# EAGLE board schematic (EAGLE 5.12)
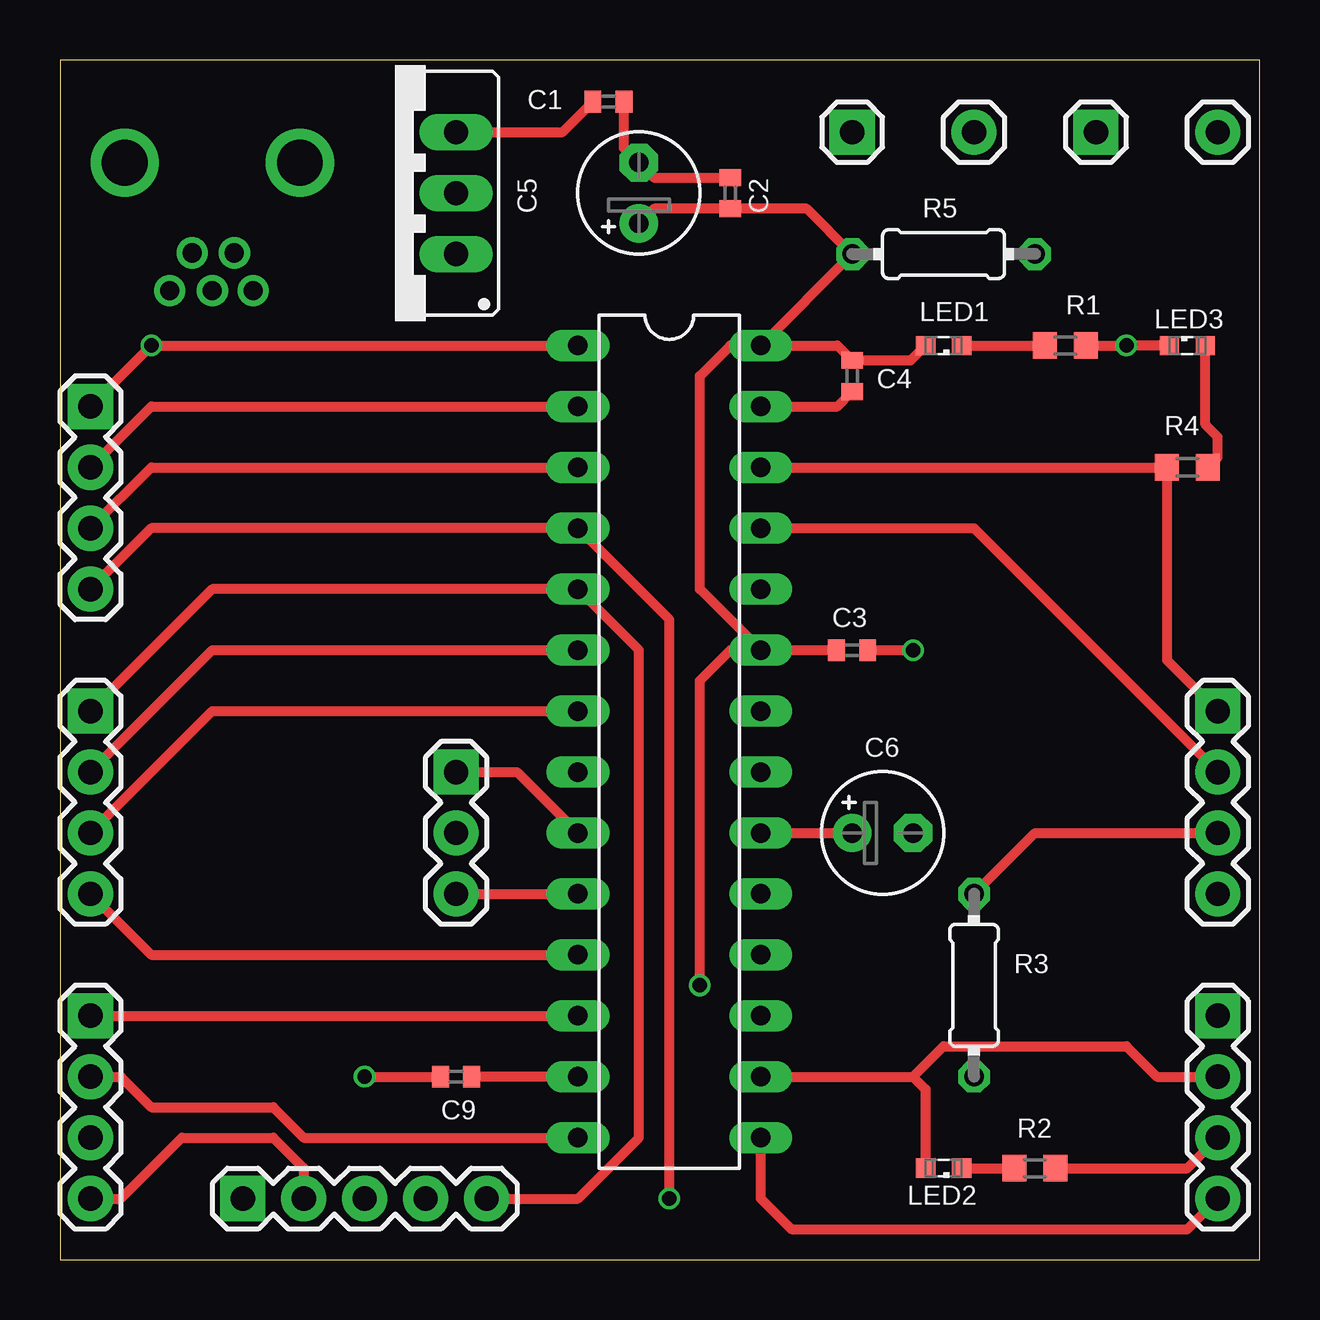
[diagram p0: board, top side]
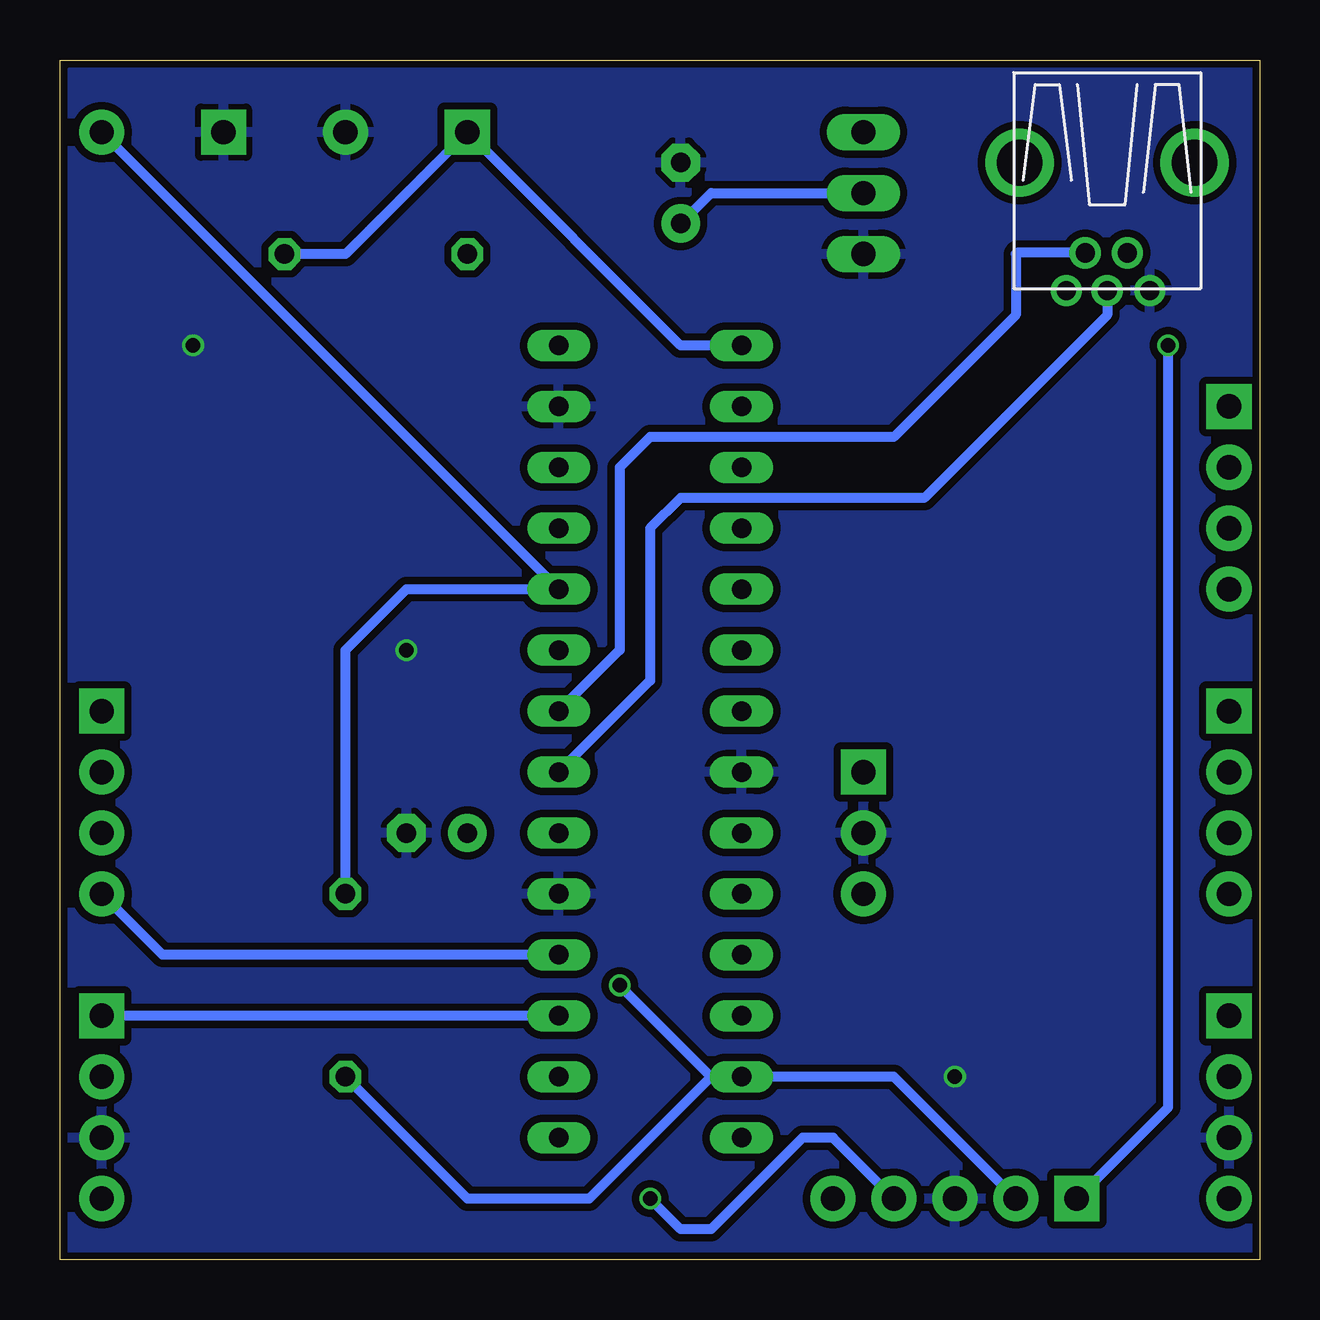
[diagram p1: board, bottom side, seen from below]

Size 50 x 50 mm. Coordinates in mm from the lower left corner, seen from the top.
Outline: 0,0 50,0 50,50 0,50 0,0
Copper layers (1*16): Top 0.035mm / dielectric 1.5mm / Bottom 0.035mm
Design rules "SeeedStudio_2layer_DRU_no_angle_20140221": minimum track width 6mil, minimum drill 12mil, track to track 6mil, track to pad 6mil, pad to pad 6mil, via to via 6mil, smd to smd 0mil, copper to edge 10mil, drill to drill 10mil, minimum pad ring 10mil, minimum via ring 6mil, stop-mask expansion 2mil, vias tented up to drill 100mil, thermal gap 10mil

## Footprints (pad centres in the part's own frame; a part is rotated, then mirrored left to right if it is on the bottom)
C0402 = smd 0.7 x 0.9: 1 -0.65,0; 2 0.65,0
E2,5-5 = drill 0.813 pad 1.6 round: + -1.27,0 | drill 0.813 pad 1.6 octagon: - 1.27,0
SML0603 = smd 0.8 x 0.8: A 0.75,0; C -0.75,0
R0603 = smd 1 x 1.1: 1 -0.85,0; 2 0.85,0
0204/7 = drill 0.813 octagon: 1 -3.81,0; 2 3.81,0
DIL28-3 = drill 0.813 long: 1 -16.51,-3.81; 2 -13.97,-3.81; 3 -11.43,-3.81; 4 -8.89,-3.81; 5 -6.35,-3.81; 6 -3.81,-3.81; 7 -1.27,-3.81; 8 1.27,-3.81; 9 3.81,-3.81; 10 6.35,-3.81; 11 8.89,-3.81; 12 11.43,-3.81; 13 13.97,-3.81; 14 16.51,-3.81; 15 16.51,3.81; 16 13.97,3.81; 17 11.43,3.81; 18 8.89,3.81; 19 6.35,3.81; 20 3.81,3.81; 21 1.27,3.81; 22 -1.27,3.81; 23 -3.81,3.81; 24 -6.35,3.81; 25 -8.89,3.81; 26 -11.43,3.81; 27 -13.97,3.81; 28 -16.51,3.81
USB-MINIB = drill 0.8 round: D+ 4.064,0; D- 2.489,0.914; GND 4.064,-1.778; ID 2.489,-0.838; VBUS 4.064,1.702 | drill 1.9 round: P$6 -1.27,-3.65; P$7 -1.27,3.65
TO220 = drill 1.016 long: 1 -2.54,0; 2 0,0; 3 2.54,0
1X03 = drill 1.016 pad 1.88 square: 1 0,0 | drill 1.016 pad 1.88 round: 2 2.54,0; 3 5.08,0
1X04 = drill 1.016 pad 1.88 square: 1 0,0 | drill 1.016 pad 1.88 round: 2 2.54,0; 3 5.08,0; 4 7.62,0
1X05 = drill 1.016 pad 1.88 square: 1 0,0 | drill 1.016 pad 1.88 round: 2 2.54,0; 3 5.08,0; 4 7.62,0; 5 10.16,0
BUTTON = drill 1.016 pad 1.88 square: 1 -2.54,0 | drill 1.016 pad 1.88 round: 2 2.54,0

## Placement (x,y rotation side)
C1  0.1uF  [C0402]  22.86,48.26 0 top
C2  0.1uF  [C0402]  27.94,44.45 90 top
C3  0.1uF  [C0402]  33.02,25.4 0 top
C4  0.1uF  [C0402]  33.02,36.83 270 top
C5  10uF  [E2,5-5]  24.13,44.45 90 top
C6  10uF  [E2,5-5]  34.29,17.78 0 top
C9  0.1uF  [C0402]  16.51,7.62 180 top
LED1  Red  [SML0603]  36.83,38.1 180 top
LED2  Red  [SML0603]  36.83,3.81 180 top
LED3  Green  [SML0603]  46.99,38.1 0 top
R1  330  [R0603]  41.91,38.1 180 top
R2  330  [R0603]  40.64,3.81 0 top
R3  10k  [0204/7]  38.1,11.43 270 top
R4  330  [R0603]  46.99,33.02 0 top
R5  10k  [0204/7]  36.83,41.91 180 top
U$1  PIC32MX250F128B  [DIL28-3]  25.4,21.59 270 top
U$2  USB  [USB-MINIB]  6.35,44.45 270 top
U$3  LD1117  [TO220]  16.51,44.45 90 top
U$5  8MHz  [1X03]  16.51,20.32 270 top
U$6  1X04_HEADER  [1X04]  1.27,35.56 270 top
U$7  1X04_HEADER  [1X04]  1.27,22.86 270 top
U$8  1X04_HEADER  [1X04]  1.27,10.16 270 top
U$9  PICKIT3  [1X05]  7.62,2.54 0 top
U$10  RESET  [BUTTON]  35.56,46.99 0 top
U$11  USER  [BUTTON]  45.72,46.99 0 top
U$12  1X04_HEADER  [1X04]  48.26,22.86 270 top
U$13  1X04_HEADER  [1X04]  48.26,10.16 270 top

## Library data of the parts
C1-C6 C9 LED1-LED3 R1-R5 U$1 U$5-U$13 = mongeon_me433
U$2 U$3 = ME433

## Nets
3.3V: C2.1 C3.1 C4.1 C5.+ C9.1 LED1.A R3.2 R5.2 U$1.13 U$1.23 U$1.28 U$3.2 U$8.4 U$9.2
5V: U$1.15 U$13.4
A0: U$1.2 U$6.2
A1: U$1.3 U$6.3
A4: U$1.12 U$8.1
B2: U$1.6 U$7.2
B3: U$1.7 U$7.3
B4: U$1.11 U$7.4
B5: U$1.14 U$8.2
B7: LED2.A U$1.16 U$13.2
B8: U$1.17 U$13.1
B9: U$1.18 U$12.4
B13: R3.1 U$1.24 U$11.2 U$12.3
B14: U$1.25 U$12.2
B15: R4.1 U$1.26 U$12.1
D+: U$1.21 U$2.D+
D-: U$1.22 U$2.D-
GND: C1.2 C2.2 C3.2 C4.2 C5.- C6.- C9.2 LED3.C R1.1 R2.2 U$1.8 U$1.19 U$1.27 U$2.GND U$3.1 U$5.2 U$8.3 U$9.3 U$10.2 U$11.1 U$13.3
MCLR: R5.1 U$1.1 U$6.1 U$9.1 U$10.1
N$1: LED1.C R1.2
N$2: C1.1 U$3.3
N$4: LED2.C R2.1
N$5: C6.+ U$1.20
N$8: LED3.A R4.2
N$9: U$1.9 U$5.1
N$11: U$1.10 U$5.3
PGC: U$1.5 U$7.1 U$9.5
PGD: U$1.4 U$6.4 U$9.4

## Tracks (layer width: path | path; a pad name or v marks a point on that pad's centre or on a via)
3.3V  (via drill 0.6)
  Top 0.406: U$8.4 2.54,2.54 5.08,5.08 8.89,5.08 10.16,3.81 U$9.2 | C5.+ 24.75,43.8 C2.1 31.13,43.8 R5.2 U$1.28 | U$1.13 C9.1 | LED1.A 35.46,37.48 C4.1 32.4,38.1 U$1.28 | U$1.23 27.94,25.4 26.67,24.13 v26.67,11.43 | U$1.23 C3.1 | U$1.28 27.94,38.1 26.67,36.83 26.67,27.94 U$1.23
  Bottom 0.406: U$3.2 22.86,44.45 C5.+ | U$9.2 15.24,7.62 U$1.13 22.86,7.62 | R3.2 33.02,2.54 27.94,2.54 22.86,7.62 | 22.86,7.62 v26.67,11.43
5V
  Top 0.406: U$1.15 29.21,2.54 30.48,1.27 46.99,1.27 U$13.4
A0
  Top 0.406: U$6.2 3.81,35.56 U$1.2
A1
  Top 0.406: U$6.3 3.81,33.02 U$1.3
A4
  Top 0.406: U$8.1 U$1.12
B2
  Top 0.406: U$7.2 6.35,25.4 U$1.6
B3
  Top 0.406: U$7.3 6.35,22.86 U$1.7
B4
  Top 0.406: U$7.4 3.81,12.7 U$1.11
B5
  Top 0.406: U$8.2 2.54,7.62 3.81,6.35 8.89,6.35 10.16,5.08 U$1.14
B7
  Top 0.406: U$13.2 45.72,7.62 44.45,8.89 36.83,8.89 35.56,7.62 | U$1.16 35.56,7.62 | LED2.A 36.08,7.1 35.56,7.62
B8
  Bottom 0.406: U$1.17 U$13.1
B9
  Bottom 0.406: U$1.18 45.72,12.7 U$12.4
B13
  Top 0.406: R3.1 40.64,17.78 U$12.3
  Bottom 0.406: U$11.2 U$1.24 35.56,27.94 38.1,25.4 R3.1
B14
  Top 0.406: U$12.2 38.1,30.48 U$1.25
B15
  Top 0.406: U$12.1 46.14,24.98 R4.1 U$1.26
D+
  Bottom 0.406: U$2.D+ 6.35,39.37 13.97,31.75 24.13,31.75 25.4,30.48 25.4,24.13 U$1.21
D-
  Bottom 0.406: U$2.D- 10.11,41.96 10.16,41.91 10.16,39.37 15.24,34.29 25.4,34.29 26.67,33.02 26.67,25.4 U$1.22
GND  (via drill 0.6)
  Top 0.406: C1.2 23.51,46.34 C5.- 24.75,45.1 C2.2 | R2.2 46.99,3.81 U$13.3 | U$1.27 32.4,35.56 C4.2 | v12.7,7.62 C9.2 | C3.2 v35.56,25.4 | R1.1 v44.45,38.1 LED3.C
  pour Bottom (isolate 0.305): 0,49.53 0,0 49.53,0 49.53,49.53
MCLR  (via drill 0.6)
  Top 0.406: U$6.1 v3.81,38.1 U$1.1
  Bottom 0.406: U$1.1 24.13,38.1 U$10.1 38.1,41.91 R5.1 | U$9.1 3.81,6.35 v3.81,38.1
N$1
  Top 0.406: LED1.C R1.2
N$2
  Top 0.406: U$3.3 20.94,46.99 C1.1
N$4
  Top 0.406: LED2.C R2.1
N$5
  Top 0.406: U$1.20 C6.+
N$8
  Top 0.406: LED3.A 47.74,34.81 48.26,34.29 48.26,33.44 R4.2
N$9
  Top 0.406: U$5.1 19.05,20.32 U$1.9
N$11
  Top 0.406: U$5.3 U$1.10
PGC
  Top 0.406: U$7.1 6.35,27.94 U$1.5 24.13,25.4 24.13,5.08 21.59,2.54 U$9.5
PGD  (via drill 0.6)
  Top 0.406: U$6.4 3.81,30.48 U$1.4 25.4,26.67 v25.4,2.54
  Bottom 0.406: U$9.4 17.78,5.08 19.05,5.08 22.86,1.27 24.13,1.27 v25.4,2.54

## Text on the board
tValues: MCLR | A0 | A1 | MATT MONGEON | B0 | ME433 | 2015 | B1 | B15 | B14 | B2 | B3 | B13 | B4 | B9 | A4 | B8 | B5 | B7 | GND | GND | 3.3V | 5V